# Altium PCB 171-5783.PcbDoc
Units mm, origin at the board's own origin, x right, y up, seen from the top; angles counter-clockwise.
Board outline 97.7 x 60.9 mm, 2 copper layers (Top Layer, Bottom Layer), stack 1.57 mm thick; 13 components, 55 nets, 208 pads, 31 vias.
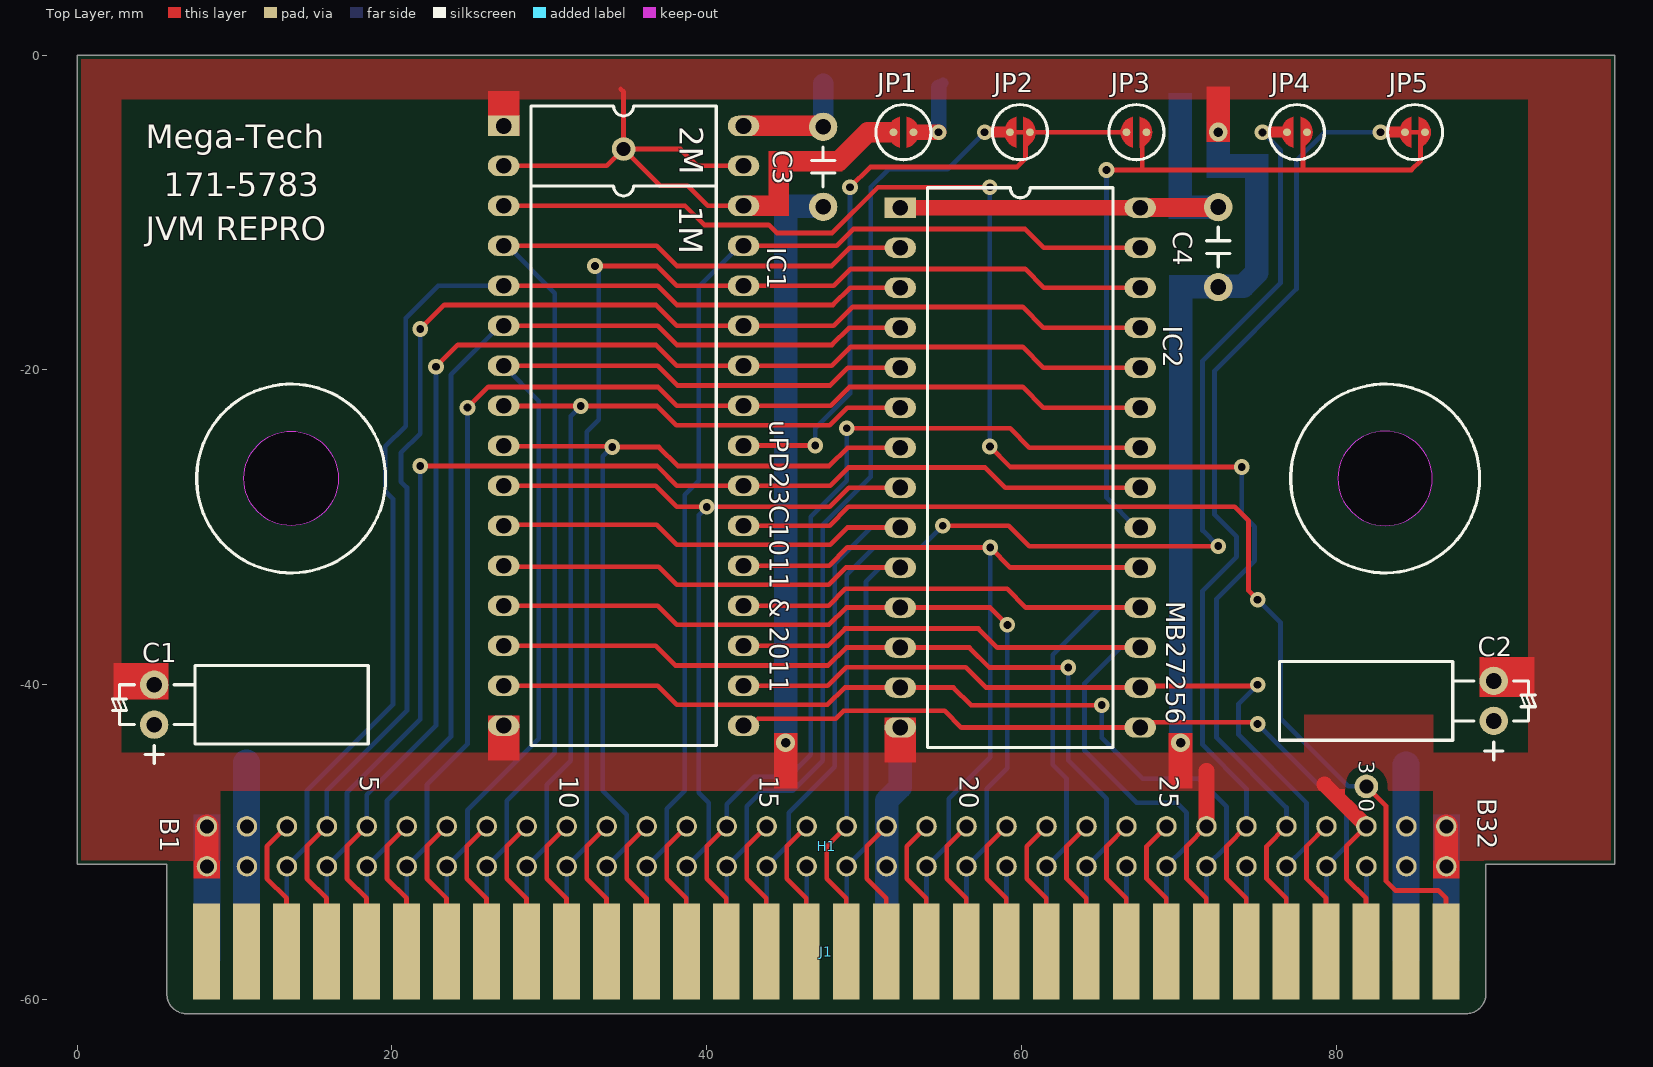
[diagram p0: Top Layer view]
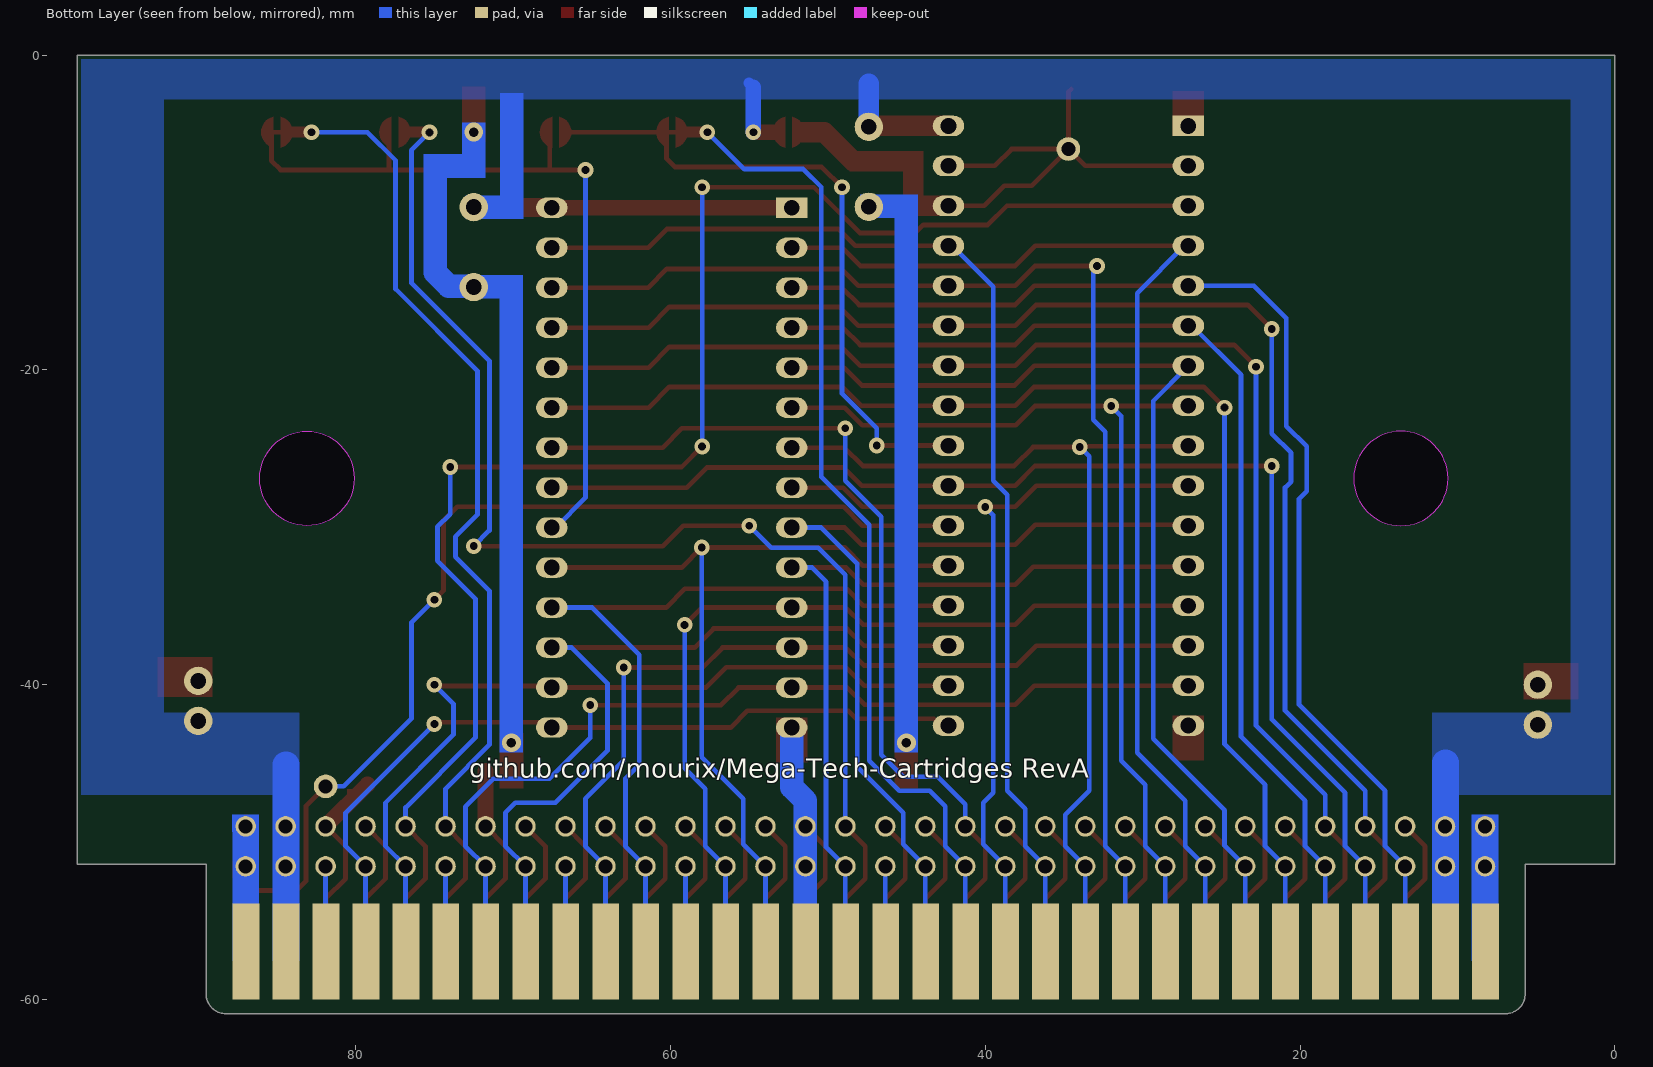
[diagram p1: Bottom Layer view, seen from below]

## Layer stack, top to bottom
Top Solder: solder mask 0.0127, Solder Resist, Dk 3.8
Top Layer: signal copper 0.035
Dielectric: core 1.5, FR-4, Dk 4.5
Bottom Layer: signal copper 0.035
Bottom Solder: solder mask 0.0127, Solder Resist, Dk 3.8

## Board outline
5.7,-59.65 5.7,-51.4 0,-51.4 0,0 97.7,0 97.7,-51.4 89.5,-51.4 89.5,-59.65 89.5,-59.668 cw(c88.25,-59.65) 88.232,-60.9 88.25,-60.9 6.95,-60.9 6.932,-60.9 cw(c6.95,-59.65)
cut-out: 80.1,-26.9 ccw(c83.1,-26.9) 83.1,-29.9 ccw(c83.1,-26.9) 86.1,-26.9 ccw(c83.1,-26.9) 83.1,-23.9 ccw(c83.1,-26.9)
cut-out: 13.6,-29.9 cw(c13.6,-26.9) 10.6,-26.9 cw(c13.6,-26.9) 13.6,-23.9 cw(c13.6,-26.9) 16.6,-26.9 cw(c13.6,-26.9)

## Design rules (kind name [scope] priority, off if disabled: settings)
BoardOutlineClearance [not InComponent('J1')] p1: gap=0.254 ignorepadtopadclearanceinfootprint=FALSE
Clearance [All] p1: gap=0.2 ignorepadtopadclearanceinfootprint=FALSE except(0.15: Arc-Arc Arc-Track Arc-Text Track-Track Track-Text SMDPad-Text THPad-Text Via-Text Fill-Text Poly-Text Region-Text Text-Text; 0.25: Arc-Hole Track-Hole SMDPad-Hole THPad-Hole Via-Hole Fill-Hole Poly-Hole Region-Hole Text-Hole; 0.6: THPad-Fill THPad-Poly THPad-Region)
ComponentClearance [All] p1: gap=0.127 collisioncheckmode=3 verticalgap=0.127 showdistances=TRUE
DiffPairsRouting [All] p1: maxlimit=0.254 minlimit=0.127 mostfreqgap=0.127 toplayer_minwidth=0.127 toplayer_maxwidth=25.4 toplayer_prefwidth=0.127 bottomlayer_minwidth=0.127 bottomlayer_maxwidth=25.4 bottomlayer_prefwidth=0.127 maxuncoupledlength=12.7
Height [All] p1: minheight=0 maxheight=1816.048 prefheight=12.7
HoleSize [All] p1: absolutevalues=TRUE maxlimit=6.3 minlimit=0.3 maxpercent=80.000 minpercent=20.000
HoleToHoleClearance [All] p1: gap=0.25 allowstackedmicrovias=FALSE
MinimumAnnularRing [All] p1: minimumring=0.076
MinimumSolderMaskSliver [All] p1: minsoldermaskwidth=0.1
PlaneClearance [All] p1: clearance=0.15
PlaneConnect PlaneConnectPowerPads [InPadClass('PowerPads')] p1: planeconnectstyle=Direct reliefexpansion=0.508 reliefentries=4 reliefconductorwidth=0.254 reliefairgap=0.254
PlaneConnect [All] p2: pad.planeconnectstyle=Relief pad.reliefexpansion=0.3 pad.reliefentries=4 pad.reliefconductorwidth=0.127 pad.reliefairgap=0.127 via.planeconnectstyle=Direct via.reliefexpansion=0.3 via.reliefentries=4 via.reliefconductorwidth=0.127 via.reliefairgap=0.127
PolygonConnect [All] p1: connectstyle=Direct reliefconductorwidth=0.254 reliefentries=4 polygonreliefangle="90 Angle" airgapwidth=0.15
RoutingVias [All] p1: holewidth=0.3 width=0.6 viastyle="Through Hole" minholewidth=0.3 minwidth=0.6 maxholewidth=0.6 maxwidth=6.6
SilkToSilkClearance [All] p1: silktosilkclearance=0
SilkToSolderMaskClearance [IsPad] p1: minsilkscreentomaskgap=0.127 clearancetoexposedcopper=TRUE
SolderMaskExpansion SolderMaskExpansion_via [IsVia] p1: expansion=0.102 istentingtop=TRUE
SolderMaskExpansion [All] p2: expansion=0.1 istentingtop=FALSE
Width [All] p1: maxlimit=25.4 minlimit=0.15 preferedwidth=0.254 minimp=50.000000 maximp=50.000000 favimp=50.000000
20 further rules are at their usual default settings.

## Components (designator, comment, footprint, x,y, rotation, side; value= is the part's Value field where it differs from the comment)
C1 "Cap2.54P5.0D" "CapPol Mirror" 4.9,-41.27 r270 top locked value=47uF
C2 "Cap2.54P5.0D" CapPol 90,-41.03 r90 top locked value=10uF
C3 "CapCer" CapCer 47.4,-7.1 r90 top locked value=22nF
C4 "CapCer" CapCer 72.5,-12.2 r90 top locked value=22nF
H1 "Header_2x32" Header_2x32 8.25,-49 r0 top locked
IC1 "UPD23C1011/2011" UPD23C1011/2011 27.1,-4.5 r0 top locked
IC2 "27256" 27256 52.3,-9.7 r0 top locked
J1 "MT Cart Edge" MT_Cart_Edge 5.7,-60.9 r0 top locked
JP1 "SolderBridge" SOLDER_BRIDGE 52.5,-4.9 r0 top locked
JP2 "SolderBridge" SOLDER_BRIDGE 59.9,-4.9 r0 top locked
JP3 "SolderBridge" SOLDER_BRIDGE 67.3,-4.9 r0 top locked
JP4 "SolderBridge" SOLDER_BRIDGE 77.5,-4.9 r0 top locked
JP5 "SolderBridge" SOLDER_BRIDGE 85,-4.9 r0 top

## Footprints (in the part's own frame and the unit in brackets; to place one, negate y for a bottom-side part, rotate by r counter-clockwise, add the part's x,y. Pads: shape width x height; smd on the part's side, far side on the other; paste and mask are expansions set on the pad)
27256 [mm]
  rect 2x1.3 hole 1: 1(0,0)
  oval 2x1.3 hole 1: 2(0,-2.54) 3(0,-5.08) 4(0,-7.62) 5(0,-10.16) 6(0,-12.7) 7(0,-15.24) 8(0,-17.78) 9(0,-20.32) 10(0,-22.86) 11(0,-25.4) 12(0,-27.94) 13(0,-30.48) 14(0,-33.02) 15(15.24,-33.02) 16(15.24,-30.48) 17(15.24,-27.94) 18(15.24,-25.4) 19(15.24,-22.86) 20(15.24,-20.32) 21(15.24,-17.78) 22(15.24,-15.24) 23(15.24,-12.7) 24(15.24,-10.16) 25(15.24,-7.62) 26(15.24,-5.08) 27(15.24,-2.54) 28(15.24,0)
  silkscreen extent 1.73,-34.29 13.51,1.27, body extent 0,-35.31 15.24,2.03, height 5.79
CapCer [mm]
  round 1.8 hole 1: 1(-2.54,0) 2(2.54,0)
  silkscreen extent -1.27,-0.75 1.27,0.75
CapPol [mm]
  round 1.8 hole 1: 1(-1.27,0) 2(1.27,0)
  silkscreen extent -3.75,-2.68 2.5,13.6
"CapPol Mirror" [mm]
  round 1.8 hole 1: 1(1.27,0) 2(-1.27,0)
  silkscreen extent -2.5,-2.68 3.75,13.6
Header_2x32 [mm]
  round 1.3 hole 0.9: A1(0,-2.54) A2(2.54,-2.54) A3(5.08,-2.54) A4(7.62,-2.54) A5(10.16,-2.54) A6(12.7,-2.54) A7(15.24,-2.54) A8(17.78,-2.54) A9(20.32,-2.54) A10(22.86,-2.54) A11(25.4,-2.54) A12(27.94,-2.54) A13(30.48,-2.54) A14(33.02,-2.54) A15(35.56,-2.54) A16(38.1,-2.54) A17(40.64,-2.54) A18(43.18,-2.54) A19(45.72,-2.54) A20(48.26,-2.54) A21(50.8,-2.54) A22(53.34,-2.54) A23(55.88,-2.54) A24(58.42,-2.54) A25(60.96,-2.54) A26(63.5,-2.54) A27(66.04,-2.54) A28(68.58,-2.54) A29(71.12,-2.54) A30(73.66,-2.54) A31(76.2,-2.54) A32(78.74,-2.54) B1(0,0) B2(2.54,0) B3(5.08,0) B4(7.62,0) B5(10.16,0) B6(12.7,0) B7(15.24,0) B8(17.78,0) B9(20.32,0) B10(22.86,0) B11(25.4,0) B12(27.94,0) B13(30.48,0) B14(33.02,0) B15(35.56,0) B16(38.1,0) B17(40.64,0) B18(43.18,0) B19(45.72,0) B20(48.26,0) B21(50.8,0) B22(53.34,0) B23(55.88,0) B24(58.42,0) B25(60.96,0) B26(63.5,0) B27(66.04,0) B28(68.58,0) B29(71.12,0) B30(73.66,0) B31(76.2,0) B32(78.74,0)
MT_Cart_Edge [mm]
  rect 1.7x6.1 smd far side: A1(2.53,3.95) A2(5.07,3.95) A3(7.61,3.95) A4(10.15,3.95) A5(12.69,3.95) A6(15.23,3.95) A7(17.77,3.95) A8(20.31,3.95) A9(22.85,3.95) A10(25.39,3.95) A11(27.93,3.95) A12(30.47,3.95) A13(33.01,3.95) A14(35.55,3.95) A15(38.09,3.95) A16(40.63,3.95) A17(43.17,3.95) A18(45.71,3.95) A19(48.25,3.95) A20(50.79,3.95) A21(53.33,3.95) A22(55.87,3.95) A23(58.41,3.95) A24(60.95,3.95) A25(63.49,3.95) A26(66.03,3.95) A27(68.57,3.95) A28(71.11,3.95) A29(73.65,3.95) A30(76.19,3.95) A31(78.73,3.95) A32(81.27,3.95)
  rect 1.7x6.1 smd: B1(2.53,3.95) B2(5.07,3.95) B3(7.61,3.95) B4(10.15,3.95) B5(12.69,3.95) B6(15.23,3.95) B7(17.77,3.95) B8(20.31,3.95) B9(22.85,3.95) B10(25.39,3.95) B11(27.93,3.95) B12(30.47,3.95) B13(33.01,3.95) B14(35.55,3.95) B15(38.09,3.95) B16(40.63,3.95) B17(43.17,3.95) B18(45.71,3.95) B19(48.25,3.95) B20(50.79,3.95) B21(53.33,3.95) B22(55.87,3.95) B23(58.41,3.95) B24(60.95,3.95) B25(63.49,3.95) B26(66.03,3.95) B27(68.57,3.95) B28(71.11,3.95) B29(73.65,3.95) B30(76.19,3.95) B31(78.73,3.95) B32(81.27,3.95)
SOLDER_BRIDGE [mm]
  round 0.5 smd: 1(-0.635,0) 2(0.635,0)
  Top Layer region: -0.225,-0.974 -0.625,-0.781 -0.901,-0.433 -1,0 -0.901,0.433 -0.625,0.781 -0.225,0.974 -0.225,0.974
  Top Layer region: 0.225,0.974 0.625,0.781 0.901,0.433 1,0 0.901,-0.433 0.625,-0.781 0.225,-0.974 0.225,-0.974
  silkscreen extent -1.75,-1.75 1.75,1.75
UPD23C1011/2011 [mm]
  rect 2x1.3 hole 1: 1(0,0)
  oval 2x1.3 hole 1: 2(0,-2.54) 3(0,-5.08) 4(0,-7.62) 5(0,-10.16) 6(0,-12.7) 7(0,-15.24) 8(0,-17.78) 9(0,-20.32) 10(0,-22.86) 11(0,-25.4) 12(0,-27.94) 13(0,-30.48) 14(0,-33.02) 15(0,-35.56) 16(0,-38.1) 17(15.24,-38.1) 18(15.24,-35.56) 19(15.24,-33.02) 20(15.24,-30.48) 21(15.24,-27.94) 22(15.24,-25.4) 23(15.24,-22.86) 24(15.24,-20.32) 25(15.24,-17.78) 26(15.24,-15.24) 27(15.24,-12.7) 28(15.24,-10.16) 29(15.24,-7.62) 30(15.24,-5.08) 31(15.24,-2.54) 32(15.24,0)
  silkscreen extent 1.73,-39.37 13.51,1.27, body extent -0.19,-39.62 15.43,1.15, height 4.66

## Part data
C1: library part Cap2.54P5.0D_mirror, "Polarized Capacitor, 2.54mm Pitch, 5mm Width, mirrored", Voltage=16V
C2: "Polarized Capacitor, 2.54mm Pitch, 5mm Width"
C3 C4: "Capacitor (THT), Ceramic, 5.08mm Pitch"
IC1: "SMS Mapper Mask Rom, Dual footprint"
IC2: "256K EPROM"
J1: library part MT_CART_EDGE_CON
JP1 JP2 JP3 JP4 JP5: "Solder Bridge"

## Free pads (board coordinates)
  round 1.5 hole 0.9: 1(34.72,-5.969) 1(81.91,-46.46)

## Via types
v1: diameter 1, hole 0.5, Top Layer to Bottom Layer, tented both sides, 28 vias
v2: diameter 1.2, hole 0.6, Top Layer to Bottom Layer, tented both sides, 3 vias

## Nets (pads, with @x,y where several pads share a name; then routed paths per layer and width w, separated by ;. In a path a pad name is that pad's centre, name@x,y a point inside that pad or via, vN(x,y) a via of type N, cw(c..) or ccw(c..) an arc to the next point about the centre after c; other vN are vias at no path point)
A0: H1.A17 IC1.12 IC2.10 J1.A17 | length 53.1
  Top Layer w0.3: IC1.12 27.172,-32.512 36.957,-32.512 38.1,-33.655 47.75,-33.655 48.845,-32.56 IC2.10
  Bottom Layer w0.3: J1.A17@48.89,-57.38 H1.A17 50.114,-50.316 50.114,-33.452 51.006,-32.56 IC2.10
A1: H1.A15 IC1.11 IC2.9 J1.A15 | length 58.2
  Top Layer w0.3: IC1.11 27.155,-29.845 36.83,-29.845 38.1,-31.115 47.844,-31.115 48.939,-30.02 IC2.9
  Bottom Layer w0.3: J1.A15@43.81,-57.38 H1.A15 45.212,-50.138 45.212,-48.133 48.133,-45.212 48.133,-32.306 50.419,-30.02 IC2.9
A2: H1.A13 IC1.10 IC2.8 J1.A13 | length 56
  Top Layer w0.3: IC1.10 36.758,-27.36 38.098,-28.7 v1(40,-28.7) 47.813,-28.7 49.033,-27.48 IC2.8
  Bottom Layer w0.3: J1.A13@38.73,-57.38 H1.A13 40.132,-50.138 40.132,-47.498 39.497,-46.863 39.497,-29.222 40,-28.719 v1(40,-28.7)
A3: H1.A11 IC1.9 IC2.7 J1.A11 | length 60.1
  Top Layer w0.3: IC1.9 27.14,-24.86 33.96,-24.86 v1(34,-24.9) 36.965,-24.9 38.165,-26.1 47.787,-26.1 48.947,-24.94 IC2.7
  Bottom Layer w0.3: J1.A11@33.65,-57.38 H1.A11 34.925,-50.265 34.925,-48.26 33.401,-46.736 33.401,-25.499 v1(34,-24.9)
A4: H1.A9 IC1.8 IC2.6 J1.A9 | length 62.7
  Top Layer w0.3: IC1.8 27.11,-22.29 31.99,-22.29 v1(32,-22.3) 36.857,-22.3 38.068,-23.511 47.82,-23.511 48.931,-22.4 IC2.6
  Bottom Layer w0.3: J1.A9@28.57,-57.38 H1.A9 29.845,-50.265 29.845,-46.355 31.369,-44.831 31.369,-22.931 v1(32,-22.3)
A5: H1.A7 IC1.7 IC2.5 J1.A7 | length 67.2
  Top Layer w0.3: IC1.7 36.885,-19.74 38.132,-20.987 47.847,-20.987 48.974,-19.86 IC2.5
  Bottom Layer w0.3: J1.A7@23.49,-57.38 H1.A7 24.8,-50.23 24.8,-47.971 29.337,-43.434 29.337,-21.977 IC1.7
A6: H1.A5 IC1.6 IC2.4 J1.A5 | length 70.1
  Top Layer w0.3: IC1.6 36.885,-17.2 38.1,-18.415 47.958,-18.415 49.053,-17.32 IC2.4
  Bottom Layer w0.3: J1.A5@18.41,-57.38 H1.A5 19.685,-50.265 19.685,-47.371 23.749,-43.307 23.749,-20.32 26.869,-17.2 IC1.6
A7: H1.A3 IC1.5 IC2.3 J1.A3 | length 77.4
  Top Layer w0.3: IC1.5 36.885,-14.66 38.1,-15.875 48.023,-15.875 49.118,-14.78 IC2.3
  Bottom Layer w0.3: J1.A3@13.31,-57.4 13.33,-57.38 H1.A3 14.605,-50.265 14.605,-46.736 20.066,-41.275 20.066,-28.194 19.587,-27.715 19.587,-24.863 20.884,-23.566 20.884,-16.708 22.932,-14.66 IC1.5
A8: H1.B4 IC1.27 IC2.25 J1.B4 | length 91.8
  Top Layer w0.3: J1.B4@15.85,-57.4 15.85,-53.569 14.605,-52.324 14.605,-50.265 H1.B4 ; v1(21.8,-17.4) 23.325,-15.875 36.775,-15.875 38.1,-17.2 IC1.27 48.078,-17.2 49.276,-16.002 60.071,-16.002 61.389,-17.32 IC2.25
  Bottom Layer w0.3: H1.B4 15.87,-46.741 20.955,-41.656 20.955,-27.478 20.574,-27.097 20.574,-25.273 21.8,-24.047 v1(21.8,-17.4)
A9: H1.B5 IC1.26 IC2.24 J1.B5 | length 87.4
  Top Layer w0.3: J1.B5@18.39,-57.4 18.39,-53.569 17.145,-52.324 17.145,-50.265 H1.B5 ; v1(22.8,-19.8) 24.185,-18.415 36.775,-18.415 38.1,-19.74 IC1.26 47.951,-19.74 49.149,-18.542 60.071,-18.542 61.389,-19.86 IC2.24
  Bottom Layer w0.3: H1.B5 18.41,-46.99 22.8,-42.6 v1(22.8,-19.8)
A10: H1.A4 IC1.23 IC2.21 J1.A4 | length 81
  Top Layer w0.3: v1(21.8,-26.1) 36.843,-26.1 38.103,-27.36 IC1.23 47.84,-27.36 48.994,-26.206 57.702,-26.206 58.976,-27.48 IC2.21
  Bottom Layer w0.3: J1.A4@15.87,-57.38 H1.A4 17.146,-50.264 17.146,-46.862 21.8,-42.208 v1(21.8,-26.1)
A11: H1.A6 IC1.25 IC2.23 J1.A6 | length 81.4
  Top Layer w0.3: v1(24.8,-22.4) 26.118,-21.082 36.902,-21.082 38.1,-22.28 IC1.25 47.879,-22.28 49.077,-21.082 60.071,-21.082 61.389,-22.4 IC2.23
  Bottom Layer w0.3: J1.A6@20.95,-57.38 H1.A6 22.225,-50.265 22.225,-46.355 24.8,-43.78 v1(24.8,-22.4)
A12: H1.A8 IC1.4 IC2.2 J1.A8 | length 74.8
  Top Layer w0.3: IC1.4 36.82,-12.12 38.1,-13.4 47.941,-13.4 49.101,-12.24 IC2.2
  Bottom Layer w0.3: J1.A8@26.03,-57.38 H1.A8 27.305,-50.265 27.305,-47.371 30.353,-44.323 30.353,-15.123 27.35,-12.12 IC1.4
A13: H1.A10 IC1.28 IC2.26 J1.A10 | length 81
  Top Layer w0.3: v1(32.9,-13.4) 36.84,-13.4 38.1,-14.66 IC1.28 48.078,-14.66 49.149,-13.589 60.229,-13.589 61.42,-14.78 IC2.26
  Bottom Layer w0.3: J1.A10@31.11,-57.38 H1.A10 32.385,-50.265 32.385,-23.924 33.147,-23.162 33.147,-13.849 32.9,-13.602 v1(32.9,-13.4)
A14: H1.A12 IC1.29 IC2.27 J1.A12 | length 74.1
  Top Layer w0.3: IC1.29 48.248,-12.12 49.312,-11.055 60.235,-11.055 61.42,-12.24 IC2.27
  Bottom Layer w0.3: J1.A12@36.19,-57.38 H1.A12 37.465,-50.265 37.465,-47.879 38.608,-46.736 38.608,-27.94 39.497,-27.051 39.497,-14.713 42.09,-12.12 IC1.29
A15: H1.A14 IC1.24 J1.A14 JP2.1 JP2.2 JP3.1 | length 107.2
  Top Layer w0.3: IC1.24 42.35,-24.81 46.89,-24.81 v1(46.9,-24.8) ; v1(49.1,-8.4) 50.388,-7.112 59.709,-7.112 60.257,-6.564 60.257,-5.178 JP2.2 ; JP2.1 JP2.2 ; JP3.1 JP2.2
  Top Layer w0.7: v1(57.658,-4.9) JP2.1
  Bottom Layer w0.3: J1.A14@41.27,-57.38 H1.A14 42.545,-50.265 42.545,-47.728 43.537,-46.736 45.466,-46.736 47.371,-44.831 47.371,-29.85 50.419,-26.802 50.419,-8.382 51.562,-7.239 55.319,-7.239 v1(57.658,-4.9) ; v1(46.9,-24.8) 46.9,-23.712 49.1,-21.512 v1(49.1,-8.4)
A16: H1.A16 J1.A16 | length 5.8
  Bottom Layer w0.3: J1.A16@46.35,-57.38 H1.A16
A17: H1.B6 J1.B6 | length 9.4
  Top Layer w0.3: J1.B6@20.93,-57.4 20.93,-53.569 19.685,-52.324 19.685,-50.265 H1.B6
A18: H1.B7 J1.B7 | length 9.4
  Top Layer w0.3: J1.B7@23.47,-57.4 23.47,-53.569 22.225,-52.324 22.225,-50.265 H1.B7
A19: H1.B8 J1.B8 | length 9.4
  Top Layer w0.3: J1.B8@26.01,-57.4 26.01,-53.569 24.765,-52.324 24.765,-50.265 H1.B8
A20: H1.B9 J1.B9 | length 9.4
  Top Layer w0.3: J1.B9@28.55,-57.4 28.55,-53.569 27.305,-52.324 27.305,-50.265 H1.B9
A21: H1.B10 J1.B10 | length 9.4
  Top Layer w0.3: J1.B10@31.09,-57.4 31.09,-53.569 29.845,-52.324 29.845,-50.265 H1.B10
A22: H1.B11 J1.B11 | length 9.4
  Top Layer w0.3: J1.B11@33.63,-57.4 33.63,-53.569 32.385,-52.324 32.385,-50.265 H1.B11
CAS0: IC1.22 J1.B32 pad.1@81.91,-46.46 | length 68.2
  Top Layer w0.3: IC1.22 47.809,-29.9 49.007,-28.702 73.533,-28.702 74.422,-29.591 74.422,-34.022 v1(75,-34.6) ; pad.1@81.91,-46.46 83.149,-47.699 83.149,-52.466 83.755,-53.072 86.473,-53.072 86.97,-53.569 J1.B32@86.97,-57.4
  Bottom Layer w0.3: v1(75,-34.6) 76.454,-36.054 76.454,-42.164 80.75,-46.46 pad.1@81.91,-46.46
CAS0NC: H1.B16 J1.B16 | length 9.4
  Top Layer w0.3: J1.B16@46.33,-57.4 46.33,-53.569 45.085,-52.324 45.085,-50.265 H1.B16
CAS2: H1.B29 J1.B29 | length 9.4
  Top Layer w0.3: J1.B29@79.35,-57.4 79.35,-53.569 78.105,-52.324 78.105,-50.265 H1.B29
CEO: H1.B27 IC2.20 J1.B27 JP3.2 JP4.2 JP5.1 JP5.2 | length 116.2
  Top Layer w0.3: v1(65.4,-7.3) 67.669,-7.3 ; JP3.2 67.935,-4.909 67.669,-5.176 67.669,-7.3 ; J1.B27@74.27,-57.4 74.27,-53.569 73.025,-52.324 73.025,-50.265 H1.B27 ; JP4.2 78.135,-4.91 77.876,-5.169 77.876,-7.3 ; JP5.1 85.353,-4.9 ; JP5.2 85.353,-4.9 ; 67.669,-7.3 77.876,-7.3 ; 77.876,-7.3 84.775,-7.3 85.353,-6.722 85.353,-4.9
  Top Layer w0.7: v1(82.804,-4.9) JP5.1
  Bottom Layer w0.3: v1(65.4,-7.3) 65.4,-28.13 67.29,-30.02 IC2.20 ; H1.B27 74.29,-46.604 71.501,-43.815 71.501,-34.036 73.66,-31.877 73.66,-30.607 72.263,-29.21 72.263,-20.066 77.47,-14.859 77.47,-6.68 79.25,-4.9 v1(82.804,-4.9)
CEONC: H1.B17 J1.B17 JP4.1 | length 81.6
  Top Layer w0.3: J1.B17@48.87,-57.4 48.87,-53.569 47.625,-52.324 47.625,-50.265 H1.B17 ; v1(55,-29.9) 59.195,-29.9 60.495,-31.2 v1(72.5,-31.2)
  Top Layer w0.7: v1(75.311,-4.91) 75.321,-4.9 JP4.1
  Bottom Layer w0.3: H1.B17 48.89,-33.025 50.612,-31.303 53.597,-31.303 v1(55,-29.9) ; v1(72.5,-31.2) 71.501,-30.201 71.501,-19.431 76.454,-14.478 76.454,-6.053 v1(75.311,-4.91)
D0: H1.A20 IC1.13 IC2.11 J1.A20 | length 55.7
  Top Layer w0.3: IC1.13 36.885,-34.98 38.1,-36.195 47.766,-36.195 48.861,-35.1 IC2.11 58,-35.1 v1(59.1,-36.2)
  Bottom Layer w0.3: J1.A20@56.51,-57.38 H1.A20 57.785,-50.265 57.785,-46.609 59.1,-45.294 v1(59.1,-36.2)
D1: H1.A23 IC1.14 IC2.12 J1.A23 | length 57.4
  Top Layer w0.3: IC1.14 36.758,-37.52 38.014,-38.776 47.725,-38.776 48.861,-37.64 IC2.12 56.69,-37.64 57.958,-38.908 v1(62.972,-38.908)
  Bottom Layer w0.3: v1(62.972,-38.908) 62.972,-44.811 65.405,-47.244 65.405,-50.265 H1.A23 J1.A23@64.13,-57.38
D2: H1.A26 IC1.15 IC2.13 J1.A26 | length 61.4
  Top Layer w0.3: IC1.15 36.885,-40.06 38.1,-41.275 47.672,-41.275 48.767,-40.18 IC2.13 55.674,-40.18 56.794,-41.3 v1(65.1,-41.3)
  Bottom Layer w0.3: v1(65.1,-41.3) 65.1,-43.383 67.691,-45.974 71.247,-45.974 73.025,-47.752 73.025,-50.265 H1.A26 J1.A26@71.75,-57.38
D3: H1.A29 IC1.17 IC2.15 J1.A29 | length 51.4
  Top Layer w0.3: IC1.17 42.826,-42.6 43.262,-42.164 48.185,-42.164 48.693,-41.656 55.118,-41.656 56.182,-42.72 IC2.15 68.073,-42.72 68.416,-42.378 74.878,-42.378 v1(75,-42.5)
  Bottom Layer w0.3: v1(75,-42.5) 80.645,-48.145 80.645,-50.265 H1.A29 J1.A29@79.37,-57.38
D4: H1.A28 IC1.18 IC2.16 J1.A28 | length 54
  Top Layer w0.3: IC1.18 47.683,-40.06 48.859,-38.884 56.454,-38.884 57.75,-40.18 IC2.16 67.63,-40.09 74.91,-40.09 v1(75,-40)
  Bottom Layer w0.3: v1(75,-40) 73.787,-41.213 73.787,-43.18 78.105,-47.498 78.105,-50.265 H1.A28 J1.A28@76.83,-57.38
D5: H1.A25 IC1.19 IC2.17 J1.A25 | length 52.8
  Top Layer w0.3: IC1.19 47.707,-37.52 48.793,-36.434 57.262,-36.434 58.468,-37.64 IC2.17
  Bottom Layer w0.3: IC2.17 66.278,-37.64 64.008,-39.91 64.008,-44.196 67.31,-47.498 69.85,-47.498 70.485,-48.133 70.485,-50.265 H1.A25 J1.A25@69.21,-57.38
D6: H1.A22 IC1.20 IC2.18 J1.A22 | length 53.1
  Top Layer w0.3: IC1.20 47.746,-34.98 48.817,-33.909 59.092,-33.909 60.283,-35.1 IC2.18
  Bottom Layer w0.3: J1.A22@61.59,-57.38 H1.A22 62.865,-50.265 62.865,-45.966 61.976,-45.077 61.976,-38.1 64.976,-35.1 IC2.18
D7: H1.A19 IC1.21 IC2.19 J1.A19 | length 54
  Top Layer w0.3: IC1.21 47.777,-32.44 48.94,-31.278 v1(58.012,-31.278) 59.294,-32.56 IC2.19
  Bottom Layer w0.3: J1.A19@53.97,-57.38 H1.A19 55.372,-50.138 55.372,-47.244 58.012,-44.604 v1(58.012,-31.278)
D8: H1.A21 J1.A21 | length 5.8
  Bottom Layer w0.3: J1.A21@59.05,-57.38 H1.A21
D9: H1.A24 J1.A24 | length 5.8
  Bottom Layer w0.3: J1.A24@66.67,-57.38 H1.A24
D10: H1.A27 J1.A27 | length 5.8
  Bottom Layer w0.3: J1.A27@74.29,-57.38 H1.A27
D11: H1.A30 J1.A30 | length 5.8
  Bottom Layer w0.3: J1.A30@81.91,-57.38 H1.A30
D12: H1.B25 J1.B25 | length 9.8
  Top Layer w0.3: J1.B25@69.19,-57.4 69.19,-53.569 67.945,-52.324 67.945,-50.265 H1.B25@69.448,-48.762
D13: H1.B24 J1.B24 | length 9.4
  Top Layer w0.3: J1.B24@66.65,-57.4 66.65,-53.569 65.405,-52.324 65.405,-50.265 H1.B24
D14: H1.B23 J1.B23 | length 9.4
  Top Layer w0.3: J1.B23@64.11,-57.4 64.11,-53.569 62.865,-52.324 62.865,-50.265 H1.B23
D15: H1.B22 J1.B22 | length 9.4
  Top Layer w0.3: J1.B22@61.57,-57.4 61.57,-53.569 60.325,-52.324 60.325,-50.265 H1.B22
DTACK: H1.B20 J1.B20 | length 9.4
  Top Layer w0.3: J1.B20@56.49,-57.4 56.49,-53.569 55.245,-52.324 55.245,-50.265 H1.B20
GND: C1.2 C2.2 C3.1 C4.1 H1.A1 H1.A18 H1.A32 H1.B1 H1.B18 H1.B26 H1.B30 H1.B32 IC1.1 IC1.2 IC1.16 IC1.30 IC1.31 IC2.14 J1.A1 J1.A18 J1.A32 J1.B18 J1.B26 J1.B30 JP1.1 pad.1@34.72,-5.969 | length 107.9
  Top Layer w0.3: IC1.2 33.649,-7.04 pad.1@34.72,-5.969 ; 34.544,-2.159 34.72,-2.335 pad.1@34.72,-5.969 ; IC1.30 40.06,-9.58 38.79,-8.31 37.061,-8.31 pad.1@34.72,-5.969 ; IC1.31 39.402,-7.04 38.331,-5.969 pad.1@34.72,-5.969 ; J1.B18@51.41,-57.4 51.41,-53.569 50.165,-52.324 50.165,-50.265 H1.B18 ; J1.B26@71.73,-57.4 71.73,-53.569 70.485,-52.324 70.485,-50.265 H1.B26 ; J1.B30@81.89,-57.4 81.89,-53.569 80.645,-52.324 80.645,-50.265 H1.B30
  Top Layer w1: H1.B26 71.75,-45.471 ; 79.248,-46.338 H1.B30
  Top Layer w1.3: 48.386,-6.755 50.241,-4.9 51.612,-4.9
  Top Layer w1.5: H1.A1 H1.B1 ; H1.A32 H1.B32
  Bottom Layer w0.3: J1.A1@8.23,-57.4 J1.A1@8.25,-57.38
  Bottom Layer w1.5: J1.A18@51.41,-57.4 51.43,-57.38 H1.A18 H1.B18 51.43,-47.376 52.3,-46.506 IC2.14@52.3,-42.926 ; C4.1 72.557,-14.683 74.081,-14.683 74.947,-13.817
  Bottom Layer w1.7: J1.A1@8.25,-57.38 H1.A1 H1.B1@8.25,-49.126 ; J1.A32@86.99,-57.38 H1.A32 H1.B32@86.99,-49.276
  other v2: 45.017,-43.688 70.104,-43.688 72.5,-4.9
LWR: H1.B28 IC1.3 J1.B28 | length 101.3
  Top Layer w0.3: IC1.3 38.621,-9.58 39.836,-10.795 43.942,-10.795 44.45,-11.303 47.98,-11.303 50.883,-8.4 v1(57.987,-8.4) ; v1(57.987,-24.861) 59.3,-26.175 v1(73.993,-26.175) ; J1.B28@76.81,-57.4 76.81,-53.569 75.565,-52.324 75.565,-50.265 H1.B28
  Bottom Layer w0.3: v1(57.987,-24.861) v1(57.987,-8.4) ; v1(73.993,-26.175) 73.993,-29.162 74.803,-29.972 74.803,-32.131 72.39,-34.544 72.39,-43.364 76.83,-47.804 H1.B28
NC1: H1.B3 J1.B3 | length 9.4
  Top Layer w0.3: J1.B3@13.31,-57.4 13.31,-53.569 12.065,-52.324 12.065,-50.265 H1.B3
NC2: H1.B12 J1.B12 | length 9.4
  Top Layer w0.3: J1.B12@36.17,-57.4 36.17,-53.569 34.925,-52.324 34.925,-50.265 H1.B12
NC3: H1.B13 J1.B13 | length 9.4
  Top Layer w0.3: J1.B13@38.71,-57.4 38.71,-53.569 37.465,-52.324 37.465,-50.265 H1.B13
NC4: H1.B15 J1.B15 | length 9.4
  Top Layer w0.3: J1.B15@43.79,-57.4 43.79,-53.569 42.545,-52.324 42.545,-50.265 H1.B15
NC5: H1.B19 J1.B19 | length 9.4
  Top Layer w0.3: J1.B19@53.95,-57.4 53.95,-53.569 52.705,-52.324 52.705,-50.265 H1.B19
NC6: H1.B21 J1.B21 | length 9.4
  Top Layer w0.3: J1.B21@59.03,-57.4 59.03,-53.569 57.785,-52.324 57.785,-50.265 H1.B21
OE: H1.B14 IC2.22 J1.B14 | length 58.3
  Top Layer w0.3: J1.B14@41.25,-57.4 41.25,-53.569 40.005,-52.324 40.005,-50.265 H1.B14 ; v1(48.9,-23.712) 59.272,-23.712 60.5,-24.94 IC2.22
  Bottom Layer w0.3: H1.B14 41.27,-47.606 43.029,-45.847 45.212,-45.847 46.609,-44.45 46.609,-29.337 48.9,-27.046 v1(48.9,-23.712)
VCC: C1.1 C2.1 C3.2 C4.2 H1.A2 H1.A31 H1.B2 H1.B31 IC1.32 IC2.1 IC2.28 J1.A2 J1.A31 JP1.2 | length 57.5
  Top Layer w0.5: IC2.28 IC2.28@67.56,-9.68 ; C4.2@72.48,-9.68 C4.2
  Top Layer w1: IC2.1 IC2.28 ; JP1.2@53.235,-4.9 v1(54.737,-4.9)
  Top Layer w1.2: IC2.28@67.56,-9.68 C4.2@72.48,-9.68
  Top Layer w1.3: IC1.32 C3.2@47.34,-4.5
  Bottom Layer w0.3: IC1.32 IC1.32@42.37,-4.53 ; C3.2@47.37,-4.53 C3.2
  Bottom Layer w0.7: 54.737,-2.05 55,-1.787
  Bottom Layer w1: v1(54.737,-4.9) 54.737,-2.05
  Bottom Layer w1.3: C3.2 47.4,-1.808
  Bottom Layer w1.7: J1.A2@10.77,-57.4 10.77,-44.958 ; J1.A31@84.43,-57.4 84.43,-45.085
pads on no net: J1.B1 J1.B2 J1.B31

## Polygon pours and split planes (outlines as drawn)
VCC on Bottom Layer "VCC_L02_P003" (solid, remove dead copper, pour order 3): 11.619,-41.783 11.619,-46.99 0,-46.99 0,0 97.7,0 97.7,-46.99 83.581,-46.99 83.581,-41.783 92.202,-41.783 92.202,-2.794 2.794,-2.794 2.794,-41.783
GND on Top Layer "GND_L01_P002" (solid, remove dead copper, pour order 2): 77.978,-41.91 77.978,-46.736 86.147,-46.736 86.147,-51.181 97.7,-51.181 97.7,0 0,0 0,-51.181 9.096,-51.181 9.096,-46.736 77.978,-46.736 77.978,-44.323 2.794,-44.323 2.794,-2.794 92.202,-2.794 92.202,-44.323 86.147,-44.323 86.147,-41.91

## Other copper
Top Layer:
  region net GND: 53.298,-42.07 51.303,-42.07 51.303,-44.944 53.298,-44.944
  region net GND: 28.098,-41.95 26.103,-41.95 26.103,-44.824 28.098,-44.824
  region net GND: 43.933,-6.098 43.933,-7.398 48.623,-7.398 48.623,-6.098
  rectangle net GND: 43.935,-10.233 45.235,-6.096
  region net GND: 45.238,-10.23 45.238,-8.93 42.338,-8.93 42.338,-10.23
  rectangle net GND: 44.266,-46.588 45.782,-43.065
  rectangle net GND: 69.353,-46.588 70.869,-43.065
  rectangle net GND: 80.137,-47.244 80.56,-46.638
  region net GND: 73.251,-2 71.751,-2 71.751,-5.523 73.251,-5.523
  rectangle net GND: 26.102,-5.15 28.097,-2.276
  region net GND: 5.793,-38.608 2.317,-38.608 2.317,-40.943 5.793,-40.943
  rectangle net GND: 89.107,-40.767 92.583,-38.227
  rectangle net GND: 86.134,-52.299 87.836,-51.177
  rectangle net GND: 7.394,-52.299 9.096,-51.177
Bottom Layer:
  region net GND: 44.271,-8.861 44.271,-10.361 47.961,-10.361 47.961,-8.861
  region net GND: 45.771,-8.861 44.271,-8.861 44.271,-44.323 45.771,-44.323
  region net GND: 70.871,-13.961 69.371,-13.961 69.371,-44.323 70.871,-44.323
  region net GND: 69.371,-13.961 69.371,-15.461 73.061,-15.461 73.061,-13.961
  region net VCC: 70.842,-2.413 69.342,-2.413 69.342,-10.409 70.842,-10.409
  region net VCC: 69.342,-8.909 69.342,-10.409 73.033,-10.409 73.033,-8.909
  region net GND: 75.692,-6.3 74.192,-6.3 74.192,-13.97 75.692,-13.97
  region net GND: 71.749,-6.3 71.749,-7.8 75.692,-7.8 75.692,-6.3
  rectangle net GND: 71.749,-7.8 73.249,-4.277
  region net GND: 9.106,-48.241 7.404,-48.241 7.404,-49.363 9.106,-49.363
  region net GND: 87.846,-48.241 86.144,-48.241 86.144,-49.363 87.846,-49.363

## Silkscreen, mask and mechanical layers (free items; w line width, h text height)
Top Overlay:
  circle w0.2: c83.1,-26.9 r6
  circle w0.2: c13.6,-26.9 r6
  text "2M" at 38.3,-4.518 h1.5 r270
  text "Mega-Tech" at 4.364,-5.931 h1.5
  text "171-5783" at 5.5,-8.971 h1.5
  text "1M" at 38.27,-9.568 h1.5 r270
  text "JVM REPRO" at 4.364,-11.765 h1.5
  text "uPD23C1011 & 2011" at 43.998,-23.2 h1.2 r270
  text "MB27256" at 69.198,-34.7 h1.2 r270
  text "3" at 81.429,-44.823 h1 r270
  text "5" at 17.98,-45.793 h1.2 r270
  text "10" at 30.68,-45.793 h1.2 r270
  text "15" at 43.38,-45.793 h1.2 r270
  text "20" at 56.08,-45.793 h1.2 r270
  text "25" at 68.78,-45.793 h1.2 r270
  text "B32" at 88.973,-47.2 h1.2 r270
  text "0" at 82.429,-48.107 h1 r90
  text "B1" at 5.28,-48.46 h1.2 r270
Bottom Overlay:
  text "github.com/mourix/Mega-Tech-Cartridges RevA" at 72.8,-45.9 h1.2
Top Solder:
  rectangle: 5.7,-60.9 89.5,-53.8
Bottom Solder:
  rectangle: 5.7,-60.9 89.5,-53.8
Mechanical 1:
  circle w0.15: c13.6,-26.9 r3
  circle w0.15: c83.1,-26.9 r3
  lines w0.15: 5.7,-59.65 5.7,-51.4 0,-51.4 0,0 97.7,0 97.7,-51.4 89.5,-51.4 89.5,-59.65 ; 6.95,-60.9 88.25,-60.9 ; 88.232,-60.9 ccw(c88.25,-59.65) 89.5,-59.668 ; 5.7,-59.632 ccw(c6.95,-59.65) 6.932,-60.9 cw(c6.95,-59.65) 5.7,-59.632